# EAGLE board stm32f030f4p6 (EAGLE 7.2.0)
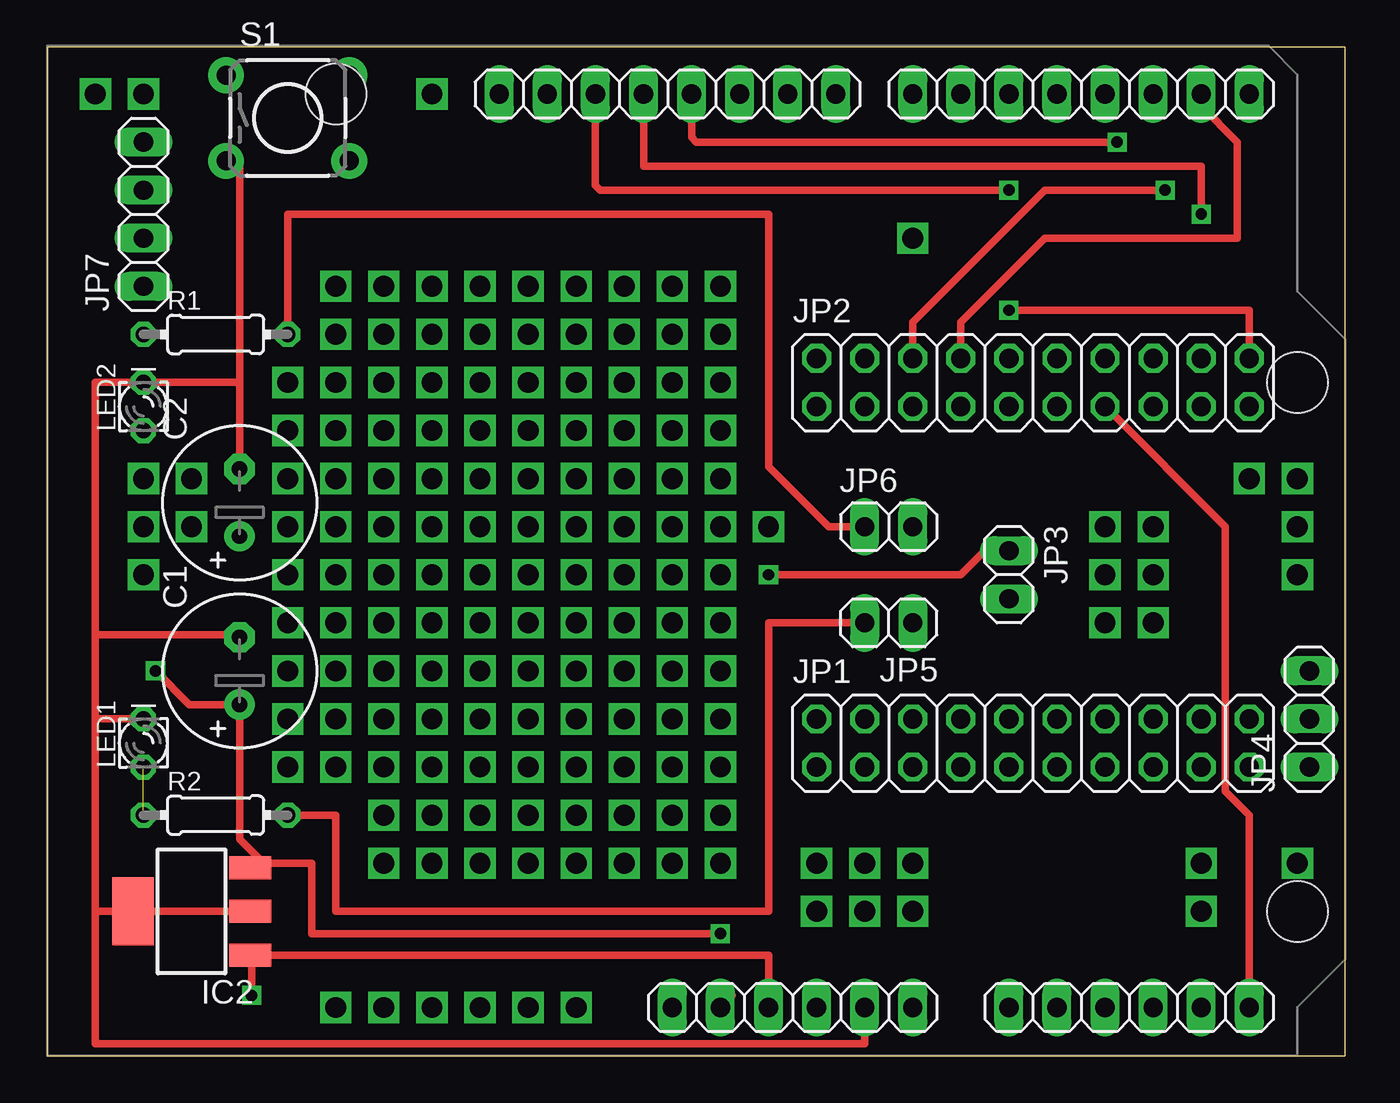
[diagram p0: board, top side]
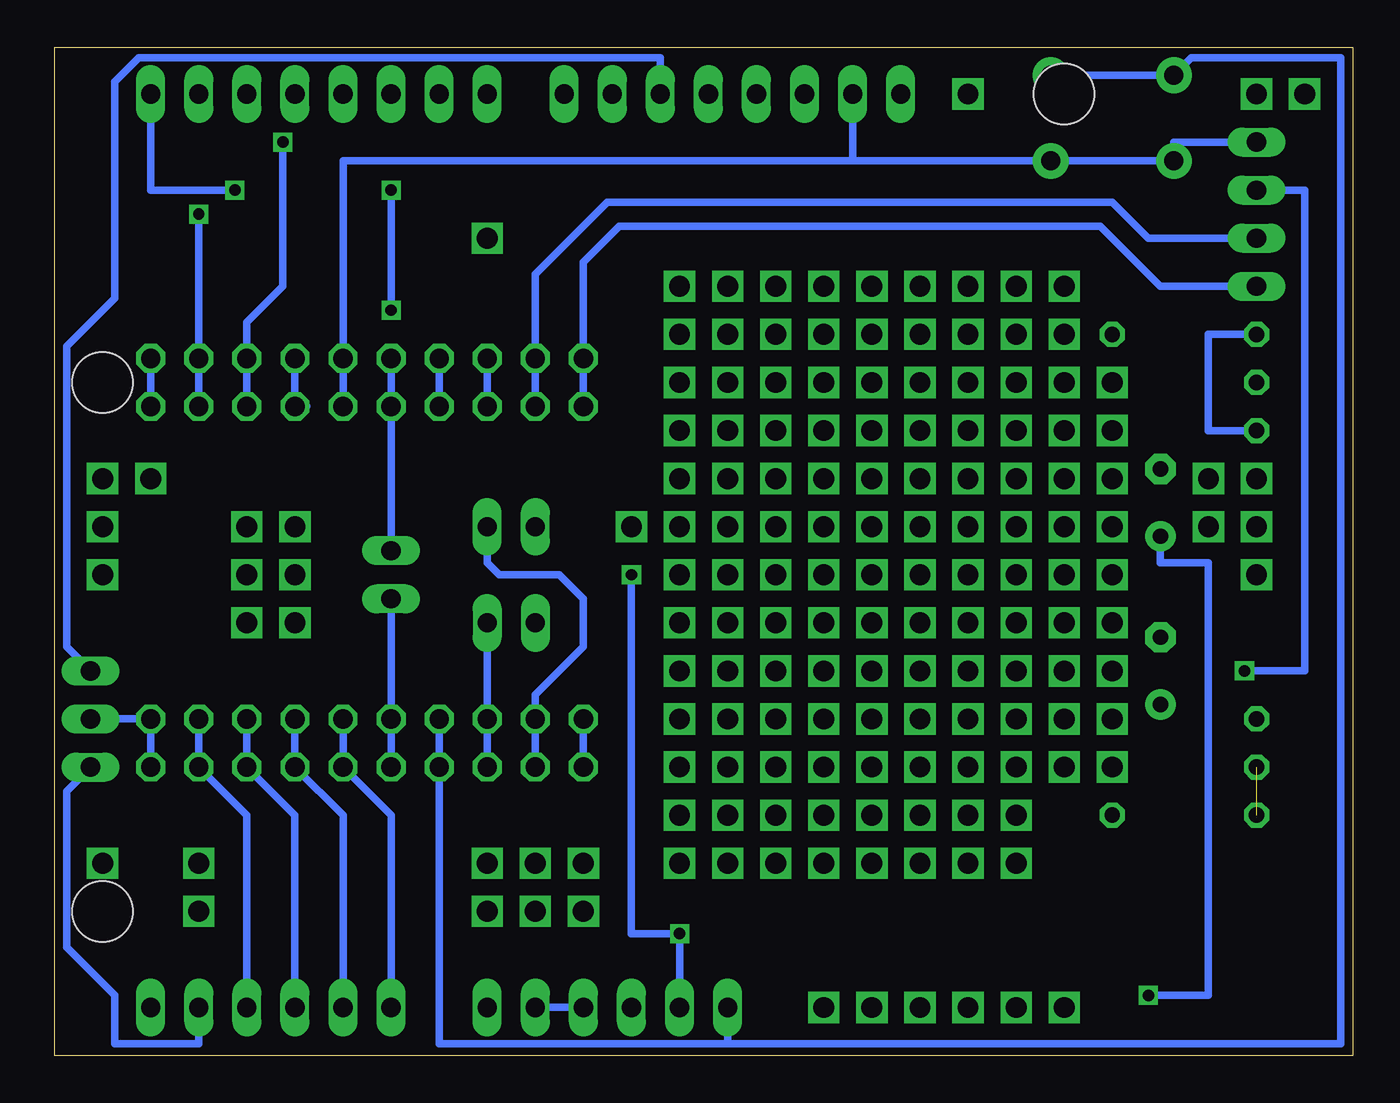
[diagram p1: board, bottom side, seen from below]

Size 68.56 x 53.26 mm. Coordinates in mm from the lower left corner, seen from the top.
Outline: 0,0 68.56,0 68.56,53.26 0,53.26 0,0
Copper layers (1*16): Top 0.035mm / dielectric 1.5mm / Bottom 0.035mm
Design rules "default": minimum track width 10mil, minimum drill 24mil, track to track 8mil, track to pad 8mil, pad to pad 8mil, via to via 8mil, smd to smd 8mil, copper to edge 40mil, drill to drill 8mil, minimum pad ring 10mil, minimum via ring 8mil, stop-mask expansion 4mil, vias tented up to drill 0mil, thermal gap 10mil

## Footprints (pad centres in the part's own frame; a part is rotated, then mirrored left to right if it is on the bottom)
E3,5-8 = drill 0.813 pad 1.6: + -1.778,0 | drill 0.813 pad 1.6 octagon: - 1.778,0
ARDUINO2009_2 = drill 1.016 long: 1 33.02,2.54; 2 35.56,2.54; 3 38.1,2.54; 4 40.64,2.54; 5 43.18,2.54; 6 45.72,2.54; 7 50.8,2.54; 8 53.34,2.54; 9 55.88,2.54; 10 58.42,2.54; 11 60.96,2.54; 12 63.5,2.54; 13 63.5,50.8; 14 60.96,50.8; 15 58.42,50.8; 16 55.88,50.8; 17 53.34,50.8; 18 50.8,50.8; 19 48.26,50.8; 20 45.72,50.8; 21 41.656,50.8; 22 39.116,50.8; 23 36.576,50.8; 24 34.036,50.8; 25 31.496,50.8; 26 28.956,50.8; 27 26.416,50.8; 28 23.876,50.8 | hole 3.2: 15.24,50.8; 66.04,35.56; 66.04,7.62
SOT223 = smd 1.219 x 2.235: 1 -2.311,-3.099; 2 0,-3.099; 3 2.311,-3.099 | smd 3.6 x 2.2: 4 0,3.099
2X10 = drill 1.016 octagon: 1 -11.43,-1.27; 2 -11.43,1.27; 3 -8.89,-1.27; 4 -8.89,1.27; 5 -6.35,-1.27; 6 -6.35,1.27; 7 -3.81,-1.27; 8 -3.81,1.27; 9 -1.27,-1.27; 10 -1.27,1.27; 11 1.27,-1.27; 12 1.27,1.27; 13 3.81,-1.27; 14 3.81,1.27; 15 6.35,-1.27; 16 6.35,1.27; 17 8.89,-1.27; 18 8.89,1.27; 19 11.43,-1.27; 20 11.43,1.27
1X02 = drill 1.016 long: 1 -1.27,0; 2 1.27,0
1X03 = drill 1.016 long: 1 -2.54,0; 2 0,0; 3 2.54,0
1X04 = drill 1.016 long: 1 -3.81,0; 2 -1.27,0; 3 1.27,0; 4 3.81,0
LED_LD260 = drill 0.813 octagon: A -1.27,0; K 1.27,0
0204/7 = drill 0.813 octagon: 1 -3.81,0; 2 3.81,0
TACTILE-PTH = drill 1.016 pad 1.88: 1 -3.251,2.261; 2 3.251,2.261; 3 -3.251,-2.261; 4 3.251,-2.261

## Placement (x,y rotation side)
C1  [E3,5-8]  10.16,20.32 90 top
C2  [E3,5-8]  10.16,29.21 90 top
IC1  [ARDUINO2009_2]  0,0 0 top
IC2  [SOT223]  7.62,7.62 90 top
JP1  [2X10]  52.07,16.51 0 top
JP2  [2X10]  52.07,35.56 0 top
JP3  [1X02]  50.8,25.4 270 top
JP4  [1X03]  66.67,17.78 90 top
JP5  [1X02]  44.45,22.86 180 top
JP6  [1X02]  44.45,27.94 0 top
JP7  [1X04]  5.08,44.45 90 top
LED1  [LED_LD260]  5.08,16.51 90 top
LED2  [LED_LD260]  5.08,34.29 90 top
R1  [0204/7]  8.89,38.1 0 top
R2  [0204/7]  8.89,12.7 0 top
S1  [TACTILE-PTH]  12.7,49.53 0 top

## Library data of the parts
C1 C2 R1 R2 = resistor
IC1 = arduino
IC2 = linear-technology; MPN: LT1129CST-5#PBF; OC_FARNELL: 1663375; OC_NEWARK: 57M2069
JP1-JP3 JP5-JP7 = pinhead
JP4 = pinhead-1
LED1 LED2 = eagle-ltspice; SPICEMODEL: NONE; SPICEPREFIX: D; SPICETYPE: diode
S1 = SparkFun

## Nets
GND: IC2.4
N$1: JP1.9 JP1.10 JP3.2
N$3: JP1.1 JP1.2
N$4: JP1.3 JP1.4 JP6.2
N$5: JP1.5 JP1.6 JP5.1
N$6: JP1.19 JP1.20 JP4.2
N$7: IC1.7 JP1.11 JP1.12
N$8: IC1.8 JP1.13 JP1.14
N$9: IC1.9 JP1.15 JP1.16
N$10: IC1.10 JP1.17 JP1.18
N$11: IC1.11 JP4.1
N$12: IC1.26 JP2.19 JP2.20
N$13: IC1.25 JP2.17 JP2.18
N$14: IC1.24 JP2.15 JP2.16
N$15: IC1.12 JP2.13 JP2.14
N$17: IC1.14 JP2.7 JP2.8
N$18: IC1.13 JP2.5 JP2.6
N$19: JP2.3 JP2.4 JP7.2
N$20: JP2.1 JP2.2 JP7.1
N$21: IC1.1 JP1.7 JP1.8 S1.1 S1.2
N$22: C1.- C2.- IC1.4 IC1.5 IC1.27 IC2.2 JP2.11 JP2.12 JP7.4 LED1.K LED2.K S1.3 S1.4
N$23: IC1.23 JP4.3
N$24: C2.+ IC1.3 IC2.1
N$25: C1.+ IC1.2 IC2.3 JP2.9 JP2.10 JP3.1 JP7.3
N$26: LED2.A R1.1
N$27: LED1.A R2.1
N$28: JP5.2 R2.2
N$29: JP6.1 R1.2

## Tracks (layer width: path | path; a pad name or v marks a point on that pad's centre or on a via)
N$1
  Bottom 0.406: JP3.2 JP1.10 JP1.9
N$2  (via drill 1.1)
  other vias: 17.78,10.16
N$3
  Bottom 0.406: JP1.2 JP1.1
N$4
  Bottom 0.406: JP1.3 JP1.4 43.18,19.05 40.64,21.59 40.64,24.13 41.91,25.4 45.09,25.4 45.72,26.04 JP6.2
N$5
  Bottom 0.406: JP1.5 JP1.6 JP5.1
N$6
  Bottom 0.406: JP1.19 JP1.20 JP4.2
N$7
  Bottom 0.406: JP1.12 JP1.11 50.8,12.7 IC1.7
N$8
  Bottom 0.406: JP1.14 JP1.13 53.34,12.7 IC1.8
N$9
  Bottom 0.406: JP1.16 JP1.15 55.88,12.7 IC1.9
N$10
  Bottom 0.406: JP1.18 JP1.17 58.42,12.7 IC1.10
N$11
  Bottom 0.406: IC1.11 60.96,0.64 65.41,0.64 65.41,3.17 67.94,5.71 67.94,13.97 JP4.1
N$12  (via drill 0.6)
  Top 0.406: IC1.26 28.96,45.97 29.21,45.72 v50.8,45.72 | v50.8,39.37 63.5,39.37 JP2.20
  Bottom 0.406: JP2.19 JP2.20 | v50.8,45.72 v50.8,39.37
N$13  (via drill 0.6)
  Top 0.406: IC1.25 31.5,46.99 60.96,46.99 v60.96,44.45
  Bottom 0.406: JP2.17 JP2.18 v60.96,44.45
N$14  (via drill 0.6)
  Top 0.406: IC1.24 34.04,48.51 34.29,48.26 v56.52,48.26
  Bottom 0.406: JP2.15 JP2.16 58.42,38.73 56.52,40.64 v56.52,48.26
N$15
  Top 0.406: JP2.13 62.23,27.94 62.23,13.97 63.5,12.7 IC1.12
  Bottom 0.406: 55.24,34.29 JP2.13 JP2.14
N$16  (via drill 1.1)
  other vias: 20.32,10.16
N$17
  Top 0.406: JP2.8 48.26,38.73 52.7,43.18 62.87,43.18 62.87,48.26 60.96,50.16 IC1.14
  Bottom 0.406: JP2.7 JP2.8
N$18  (via drill 0.6)
  Top 0.406: JP2.6 45.72,38.73 52.7,45.72 v59.05,45.72
  Bottom 0.406: JP2.5 JP2.6 | v59.05,45.72 63.5,45.72 IC1.13
N$19
  Bottom 0.406: JP2.3 JP2.4 43.18,41.27 39.37,45.09 12.7,45.09 10.79,43.18 JP7.2
N$20
  Bottom 0.406: JP2.1 JP2.2 40.64,41.91 38.73,43.81 13.34,43.81 10.16,40.64 JP7.1
N$21
  Bottom 0.406: JP1.8 JP1.7 48.26,0.64 33.02,0.64 | 33.02,0.64 0.64,0.64 0.64,52.7 8.53,52.7 S1.1 S1.2 | IC1.1 33.02,0.64
N$22
  Top 0.406: 2.54,7.62 2.54,17.78 | LED1.K 2.54,17.78 | 2.54,17.78 2.54,22.23 | 2.54,22.23 2.54,35.56 LED2.K 10.16,35.56 | 10.16,35.56 C2.- | 10.16,35.56 10.16,47.27 S1.3 | C1.- 10.16,22.23 2.54,22.23 | IC2.2 2.54,7.62 | 2.54,7.62 2.54,0.64 43.18,0.64 IC1.5
  Bottom 0.406: JP2.11 JP2.12 53.34,47.27 26.42,47.27 | IC1.5 IC1.4 | JP7.4 9.45,48.26 S1.3 S1.4 26.42,47.27 | 26.42,47.27 IC1.27
N$23
  Bottom 0.406: JP4.3 67.94,21.59 67.94,37.47 65.41,40.01 65.41,51.44 64.14,52.7 36.58,52.7 IC1.23
N$24  (via drill 0.6)
  Top 0.406: IC1.3 38.1,5.31 IC2.1 10.79,5.31 v10.79,3.17
  Bottom 0.406: C2.+ 10.16,26.04 7.62,26.04 7.62,3.17 v10.79,3.17
N$25  (via drill 0.6)
  Top 0.406: 36.2,3.17 IC1.2 | v35.56,6.44 13.97,6.44 13.97,10.16 11.43,10.16 | v38.1,25.4 48.26,25.4 49.53,26.67 JP3.1 | 11.43,10.16 10.16,11.43 C1.+ 7.49,18.54 v5.71,20.32 | 11.43,10.16 10.95,10.16 IC2.3
  Bottom 0.406: IC1.2 v35.56,6.44 38.1,6.44 v38.1,25.4 | JP3.1 JP2.9 JP2.10 | v5.71,20.32 2.54,20.32 2.54,45.72 JP7.3
N$26
  Bottom 0.406: R1.1 7.62,38.1 7.62,33.02 LED2.A
N$27  (1 unrouted)
N$28
  Top 0.406: R2.2 15.24,12.7 15.24,7.62 38.1,7.62 38.1,22.86 JP5.2
N$29
  Top 0.406: JP6.1 41.27,27.94 38.1,31.11 38.1,44.45 12.7,44.45 R1.2
N$30  (via drill 1.1)
  other vias: 22.86,10.16
N$31  (via drill 1.1)
  other vias: 25.4,10.16
N$32  (via drill 1.1)
  other vias: 27.94,10.16
N$33  (via drill 1.1)
  other vias: 30.48,10.16
N$34  (via drill 1.1)
  other vias: 33.02,10.16
N$35  (via drill 1.1)
  other vias: 35.56,10.16
N$36  (via drill 1.1)
  other vias: 35.56,12.7
N$37  (via drill 1.1)
  other vias: 35.56,15.24
N$38  (via drill 1.1)
  other vias: 35.56,17.78
N$39  (via drill 1.1)
  other vias: 35.56,20.32
N$40  (via drill 1.1)
  other vias: 35.56,22.86
N$41  (via drill 1.1)
  other vias: 35.56,25.4
N$42  (via drill 1.1)
  other vias: 35.56,27.94
N$43  (via drill 1.1)
  other vias: 35.56,30.48
N$44  (via drill 1.1)
  other vias: 35.56,33.02
N$45  (via drill 1.1)
  other vias: 35.56,35.56
N$46  (via drill 1.1)
  other vias: 35.56,38.1
N$47  (via drill 1.1)
  other vias: 35.56,40.64
N$48  (via drill 1.1)
  other vias: 33.02,40.64
N$49  (via drill 1.1)
  other vias: 33.02,38.1
N$50  (via drill 1.1)
  other vias: 33.02,35.56
N$51  (via drill 1.1)
  other vias: 33.02,33.02
N$52  (via drill 1.1)
  other vias: 33.02,30.48
N$53  (via drill 1.1)
  other vias: 33.02,27.94
N$54  (via drill 1.1)
  other vias: 33.02,25.4
N$55  (via drill 1.1)
  other vias: 33.02,22.86
N$56  (via drill 1.1)
  other vias: 33.02,20.32
N$57  (via drill 1.1)
  other vias: 33.02,17.78
N$58  (via drill 1.1)
  other vias: 33.02,15.24
N$59  (via drill 1.1)
  other vias: 33.02,12.7
N$60  (via drill 1.1)
  other vias: 30.48,12.7
N$61  (via drill 1.1)
  other vias: 30.48,15.24
N$62  (via drill 1.1)
  other vias: 30.48,20.32
N$63  (via drill 1.1)
  other vias: 30.48,22.86
N$64  (via drill 1.1)
  other vias: 30.48,25.4
N$65  (via drill 1.1)
  other vias: 30.48,27.94
N$66  (via drill 1.1)
  other vias: 30.48,33.02
N$67  (via drill 1.1)
  other vias: 30.48,35.56
N$68  (via drill 1.1)
  other vias: 30.48,30.48
N$69  (via drill 1.1)
  other vias: 30.48,17.78
N$70  (via drill 1.1)
  other vias: 27.94,12.7
N$71  (via drill 1.1)
  other vias: 22.86,12.7
N$72  (via drill 1.1)
  other vias: 25.4,12.7
N$73  (via drill 1.1)
  other vias: 20.32,12.7
N$74  (via drill 1.1)
  other vias: 17.78,12.7
N$75  (via drill 1.1)
  other vias: 17.78,15.24
N$76  (via drill 1.1)
  other vias: 17.78,17.78
N$77  (via drill 1.1)
  other vias: 17.78,20.32
N$78  (via drill 1.1)
  other vias: 17.78,22.86
N$79  (via drill 1.1)
  other vias: 17.78,25.4
N$80  (via drill 1.1)
  other vias: 17.78,27.94
N$81  (via drill 1.1)
  other vias: 17.78,30.48
N$82  (via drill 1.1)
  other vias: 17.78,33.02
N$83  (via drill 1.1)
  other vias: 17.78,35.56
N$84  (via drill 1.1)
  other vias: 17.78,38.1
N$85  (via drill 1.1)
  other vias: 17.78,40.64
N$86  (via drill 1.1)
  other vias: 22.86,40.64
N$87  (via drill 1.1)
  other vias: 20.32,40.64
N$88  (via drill 1.1)
  other vias: 25.4,40.64
N$89  (via drill 1.1)
  other vias: 27.94,40.64
N$90  (via drill 1.1)
  other vias: 30.48,40.64
N$91  (via drill 1.1)
  other vias: 30.48,38.1
N$92  (via drill 1.1)
  other vias: 27.94,38.1
N$93  (via drill 1.1)
  other vias: 25.4,38.1
N$94  (via drill 1.1)
  other vias: 22.86,38.1
N$95  (via drill 1.1)
  other vias: 20.32,38.1
N$96  (via drill 1.1)
  other vias: 20.32,35.56
N$97  (via drill 1.1)
  other vias: 22.86,35.56
N$98  (via drill 1.1)
  other vias: 25.4,35.56
N$99  (via drill 1.1)
  other vias: 27.94,35.56
N$100  (via drill 1.1)
  other vias: 27.94,33.02
N$101  (via drill 1.1)
  other vias: 25.4,33.02
N$102  (via drill 1.1)
  other vias: 22.86,33.02
N$103  (via drill 1.1)
  other vias: 20.32,33.02
N$104  (via drill 1.1)
  other vias: 20.32,30.48
N$105  (via drill 1.1)
  other vias: 22.86,30.48
N$106  (via drill 1.1)
  other vias: 25.4,30.48
N$107  (via drill 1.1)
  other vias: 27.94,30.48
N$108  (via drill 1.1)
  other vias: 27.94,27.94
N$109  (via drill 1.1)
  other vias: 25.4,27.94
N$110  (via drill 1.1)
  other vias: 22.86,27.94
N$111  (via drill 1.1)
  other vias: 27.94,25.4
N$112  (via drill 1.1)
  other vias: 27.94,22.86
N$113  (via drill 1.1)
  other vias: 27.94,20.32
N$114  (via drill 1.1)
  other vias: 27.94,17.78
N$115  (via drill 1.1)
  other vias: 27.94,15.24
N$116  (via drill 1.1)
  other vias: 25.4,15.24
N$117  (via drill 1.1)
  other vias: 25.4,20.32
N$118  (via drill 1.1)
  other vias: 25.4,22.86
N$119  (via drill 1.1)
  other vias: 25.4,25.4
N$120  (via drill 1.1)
  other vias: 25.4,17.78
N$121  (via drill 1.1)
  other vias: 22.86,17.78
N$122  (via drill 1.1)
  other vias: 22.86,15.24
N$123  (via drill 1.1)
  other vias: 20.32,15.24
N$124  (via drill 1.1)
  other vias: 20.32,17.78
N$125  (via drill 1.1)
  other vias: 20.32,20.32
N$126  (via drill 1.1)
  other vias: 20.32,22.86
N$127  (via drill 1.1)
  other vias: 20.32,25.4
N$128  (via drill 1.1)
  other vias: 20.32,27.94
N$129  (via drill 1.1)
  other vias: 22.86,22.86
N$130  (via drill 1.1)
  other vias: 22.86,20.32
N$131  (via drill 1.1)
  other vias: 22.86,25.4
N$132  (via drill 1.1)
  other vias: 15.24,40.64
N$133  (via drill 1.1)
  other vias: 15.24,38.1
N$134  (via drill 1.1)
  other vias: 15.24,35.56
N$135  (via drill 1.1)
  other vias: 15.24,15.24
N$136  (via drill 1.1)
  other vias: 15.24,33.02
N$137  (via drill 1.1)
  other vias: 15.24,25.4
N$138  (via drill 1.1)
  other vias: 15.24,22.86
N$139  (via drill 1.1)
  other vias: 15.24,17.78
N$140  (via drill 1.1)
  other vias: 15.24,30.48
N$141  (via drill 1.1)
  other vias: 15.24,27.94
N$142  (via drill 1.1)
  other vias: 15.24,20.32
N$143  (via drill 1.1)
  other vias: 38.1,27.94
N$144  (via drill 1.1)
  other vias: 55.88,22.86
N$145  (via drill 1.1)
  other vias: 58.42,22.86
N$146  (via drill 1.1)
  other vias: 58.42,25.4
N$147  (via drill 1.1)
  other vias: 55.88,25.4
N$148  (via drill 1.1)
  other vias: 55.88,27.94
N$149  (via drill 1.1)
  other vias: 58.42,27.94
N$150  (via drill 1.1)
  other vias: 66.04,25.4
N$151  (via drill 1.1)
  other vias: 66.04,27.94
N$152  (via drill 1.1)
  other vias: 66.04,30.48
N$153  (via drill 1.1)
  other vias: 63.5,30.48
N$154  (via drill 1.1)
  other vias: 45.72,43.18
N$155  (via drill 1.1)
  other vias: 20.32,50.8
N$156  (via drill 1.1)
  other vias: 2.54,50.8
N$157  (via drill 1.1)
  other vias: 5.08,50.8
N$158  (via drill 1.1)
  other vias: 5.08,25.4
N$159  (via drill 1.1)
  other vias: 5.08,27.94
N$160  (via drill 1.1)
  other vias: 5.08,30.48
N$161  (via drill 1.1)
  other vias: 12.7,15.24
N$162  (via drill 1.1)
  other vias: 12.7,35.56
N$163  (via drill 1.1)
  other vias: 12.7,25.4
N$164  (via drill 1.1)
  other vias: 12.7,33.02
N$165  (via drill 1.1)
  other vias: 12.7,17.78
N$166  (via drill 1.1)
  other vias: 12.7,20.32
N$167  (via drill 1.1)
  other vias: 12.7,22.86
N$168  (via drill 1.1)
  other vias: 12.7,27.94
N$169  (via drill 1.1)
  other vias: 12.7,30.48
N$170  (via drill 1.1)
  other vias: 7.62,27.94
N$171  (via drill 1.1)
  other vias: 7.62,30.48
N$172  (via drill 1.1)
  other vias: 40.64,7.62
N$173  (via drill 1.1)
  other vias: 43.18,7.62
N$174  (via drill 1.1)
  other vias: 45.72,7.62
N$175  (via drill 1.1)
  other vias: 45.72,10.16
N$176  (via drill 1.1)
  other vias: 43.18,10.16
N$177  (via drill 1.1)
  other vias: 40.64,10.16
N$178  (via drill 1.1)
  other vias: 27.94,2.54
N$179  (via drill 1.1)
  other vias: 25.4,2.54
N$180  (via drill 1.1)
  other vias: 22.86,2.54
N$181  (via drill 1.1)
  other vias: 20.32,2.54
N$182  (via drill 1.1)
  other vias: 17.78,2.54
N$183  (via drill 1.1)
  other vias: 15.24,2.54
N$184  (via drill 1.1)
  other vias: 60.96,7.62
N$185  (via drill 1.1)
  other vias: 60.96,10.16
N$186  (via drill 1.1)
  other vias: 66.04,10.16